# EAGLE board 1.54in-Panel (EAGLE 9.0.1)
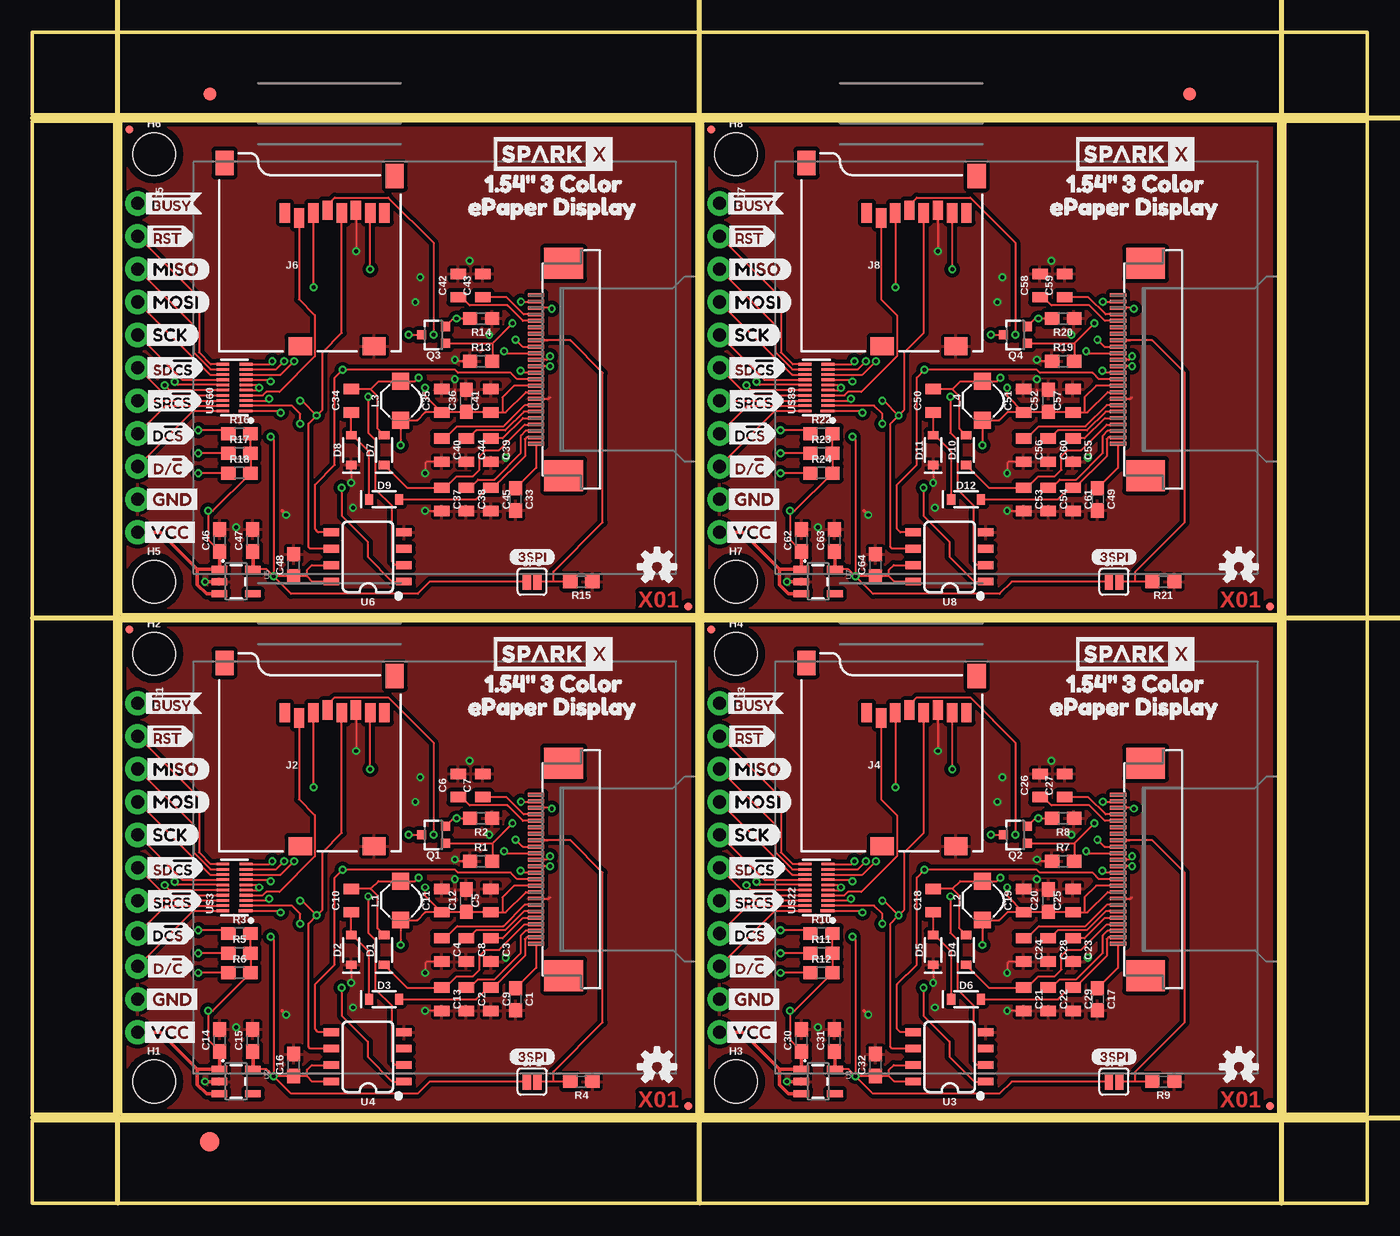
[diagram p0: board, top side]
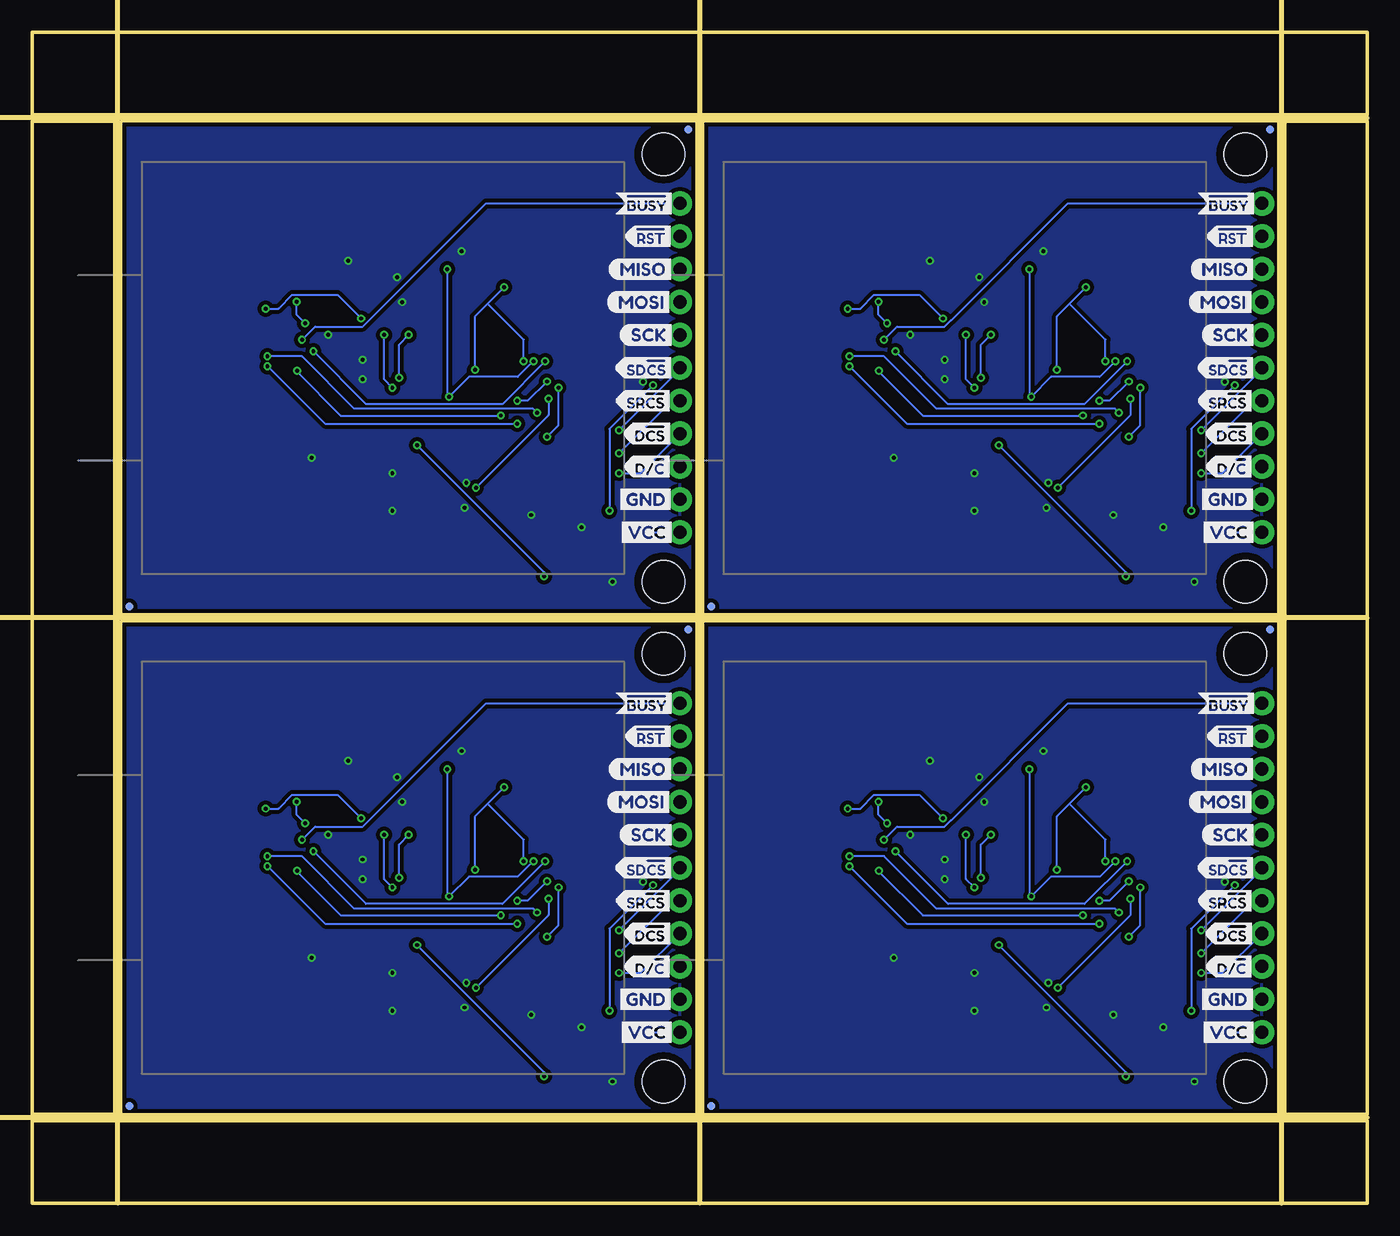
[diagram p1: board, bottom side, seen from below]

Size 103.12 x 90.42 mm. Coordinates in mm from the lower left corner, seen from the top.
Outline: 6.86,6.86 51.31,6.86 51.31,44.96 6.86,44.96 6.86,6.86
Outline: 51.82,6.86 96.27,6.86 96.27,44.96 51.82,44.96 51.82,6.86
Outline: 6.86,45.47 51.31,45.47 51.31,83.57 6.86,83.57 6.86,45.47
Outline: 51.82,45.47 96.27,45.47 96.27,83.57 51.82,83.57 51.82,45.47
Outline: 0,6.35 103.12,6.35 103.12,0 0,0 0,6.35
Outline: 96.77,83.57 103.12,83.57 103.12,6.86 96.77,6.86 96.77,83.57
Outline: 0,90.42 103.12,90.42 103.12,84.07 0,84.07 0,90.42
Outline: 0,83.57 6.35,83.57 6.35,6.86 0,6.86 0,83.57
Copper layers (1*16): Top 0.035mm / dielectric 1.5mm / Bottom 0.035mm
Design rules "SparkFun-2-layer-PCBWay-LIMIT": minimum track width 6mil, minimum drill 0.3mm, track to track 6mil, track to pad 6mil, pad to pad 6mil, via to via 6mil, smd to smd 6mil, copper to edge 6mil, drill to drill 6mil, minimum pad ring 6mil, minimum via ring 6mil, stop-mask expansion 4mil, vias tented up to drill 25mil, thermal gap 10mil
tRestrict: 4 lines
Milling: 6 lines

## Footprints (pad centres in the part's own frame; a part is rotated, then mirrored left to right if it is on the bottom)
0603 = smd 1.1 x 1: 1 -0.85,0; 2 0.85,0
0805 = smd 0.8 x 1.2: 1 -0.9,0; 2 0.9,0
SOD-323 = smd 0.63 x 0.83: A 1.15,0; C -1.15,0
FIDUCIAL-1X2 = smd 1 x 1: 1 0,0
FIDUCIAL-1.5X3 = smd 1.5 x 1.5: 1 0,0
FIDUCIAL-MICRO = smd 0.635 x 0.635: 1 0,0
STAND-OFF = hole 3.302: 0,0
1X11_NO_SILK = drill 1.016 pad 1.88: 1 0,0; 2 2.54,0; 3 5.08,0; 4 7.62,0; 5 10.16,0; 6 12.7,0; 7 15.24,0; 8 17.78,0; 9 20.32,0; 10 22.86,0; 11 25.4,0
MICRO-SD-SOCKET = smd 1.8 x 1.4: CD1 -2.05,0.4; CD2 -7.75,0.4 | smd 0.8 x 1.5: CS -7.84,10.3; DI -6.74,10.7; DO -2.34,10.7; GND -3.44,10.9; RSV1 -8.94,10.7; RSV2 -1.24,10.7; SCLK -4.54,10.7; VCC -5.64,10.9 | smd 1.4 x 1.9: GND1 -13.6,14.55; GND3 -0.45,13.55
SMT-JUMPER_2_NO_SILK = smd 0.635 x 1.27: 1 -0.406,0; 2 0.406,0
INDUCTOR_4.7UH = smd 1.3 x 1.3: P$1 -1.5,0; P$2 1.5,0
SOT323 = smd 0.7 x 0.7: 1 -0.65,-0.925; 2 0.65,-0.925; 3 0,0.925
SOT23-5 = smd 0.55 x 1.2: 1 -0.95,-1.3; 2 0,-1.3; 3 0.95,-1.3; 4 0.95,1.3; 5 -0.95,1.3
SO08 = smd 0.6 x 1.2: 1 -1.905,-2.8; 2 -0.635,-2.8; 3 0.635,-2.8; 4 1.905,-2.8; 5 1.905,2.8; 6 0.635,2.8; 7 -0.635,2.8; 8 -1.905,2.8
24_PIN_FPC_0.5MM = smd 0.3 x 1.25: 1 5.75,2.225; 2 5.25,2.225; 3 4.75,2.225; 4 4.25,2.225; 5 3.75,2.225; 6 3.25,2.225; 7 2.75,2.225; 8 2.25,2.225; 9 1.75,2.225; 10 1.25,2.225; 11 0.75,2.225; 12 0.25,2.225; 13 -0.25,2.225; 14 -0.75,2.225; 15 -1.25,2.225; 16 -1.75,2.225; 17 -2.25,2.225; 18 -2.75,2.225; 19 -3.25,2.225; 20 -3.75,2.225; 21 -4.25,2.225; 22 -4.75,2.225; 23 -5.25,2.225; 24 -5.75,2.225 | smd 2.4 x 3: NC1 8.2,0.1; NC2 -8.2,0.1
UFDFN-20 = smd 0.2 x 1.1: 1 -1.8,-0.85 | smd 0.2 x 1: 2 -1.4,-0.9; 3 -1,-0.9; 4 -0.6,-0.9; 5 -0.2,-0.9; 6 0.2,-0.9; 7 0.6,-0.9; 8 1,-0.9; 9 1.4,-0.9; 10 1.8,-0.9; 11 1.8,0.9; 12 1.4,0.9; 13 1,0.9; 14 0.6,0.9; 15 0.2,0.9; 16 -0.2,0.9; 17 -0.6,0.9; 18 -1,0.9; 19 -1.4,0.9; 20 -1.8,0.9

## Placement (x,y rotation side)
C1  1.0uF  [0603]  37.34,15.75 270 top
C2  1.0uF  [0805]  33.53,15.75 270 top
C3  1.0uF  [0805]  35.43,19.56 270 top
C4  1.0uF  [0805]  31.62,19.56 270 top
C5  1.0uF  [0805]  35.43,23.37 90 top
C6  1.0uF  [0805]  32.89,32.26 90 top
C7  1.0uF  [0805]  34.8,32.26 90 top
C8  1.0uF  [0805]  33.53,19.56 270 top
C9  1.0uF  [0805]  35.43,15.75 270 top
C10  4.7uF  [0805]  24.64,23.37 90 top
C11  4.7uF  [0805]  31.62,23.37 90 top
C12  0.1uF  [0603]  33.53,23.37 90 top
C13  1.0uF  [0805]  31.62,15.75 270 top
C14  1.0uF  [0603]  14.48,12.57 90 top
C15  1.0uF  [0603]  17.02,12.57 90 top
C16  0.1uF  [0603]  20.19,10.67 90 top
C17  1.0uF  [0603]  82.3,15.75 270 top
C18  4.7uF  [0805]  69.6,23.37 90 top
C19  4.7uF  [0805]  76.58,23.37 90 top
C20  0.1uF  [0603]  78.49,23.37 90 top
C21  1.0uF  [0805]  76.58,15.75 270 top
C22  1.0uF  [0805]  78.49,15.75 270 top
C23  1.0uF  [0805]  80.39,19.56 270 top
C24  1.0uF  [0805]  76.58,19.56 270 top
C25  1.0uF  [0805]  80.39,23.37 90 top
C26  1.0uF  [0805]  77.85,32.26 90 top
C27  1.0uF  [0805]  79.76,32.26 90 top
C28  1.0uF  [0805]  78.49,19.56 270 top
C29  1.0uF  [0805]  80.39,15.75 270 top
C30  1.0uF  [0603]  59.44,12.57 90 top
C31  1.0uF  [0603]  61.98,12.57 90 top
C32  0.1uF  [0603]  65.15,10.67 90 top
C33  1.0uF  [0603]  37.34,54.36 270 top
C34  4.7uF  [0805]  24.64,61.98 90 top
C35  4.7uF  [0805]  31.62,61.98 90 top
C36  0.1uF  [0603]  33.53,61.98 90 top
C37  1.0uF  [0805]  31.62,54.36 270 top
C38  1.0uF  [0805]  33.53,54.36 270 top
C39  1.0uF  [0805]  35.43,58.17 270 top
C40  1.0uF  [0805]  31.62,58.17 270 top
C41  1.0uF  [0805]  35.43,61.98 90 top
C42  1.0uF  [0805]  32.89,70.87 90 top
C43  1.0uF  [0805]  34.8,70.87 90 top
C44  1.0uF  [0805]  33.53,58.17 270 top
C45  1.0uF  [0805]  35.43,54.36 270 top
C46  1.0uF  [0603]  14.48,51.18 90 top
C47  1.0uF  [0603]  17.02,51.18 90 top
C48  0.1uF  [0603]  20.19,49.28 90 top
C49  1.0uF  [0603]  82.3,54.36 270 top
C50  4.7uF  [0805]  69.6,61.98 90 top
C51  4.7uF  [0805]  76.58,61.98 90 top
C52  0.1uF  [0603]  78.49,61.98 90 top
C53  1.0uF  [0805]  76.58,54.36 270 top
C54  1.0uF  [0805]  78.49,54.36 270 top
C55  1.0uF  [0805]  80.39,58.17 270 top
C56  1.0uF  [0805]  76.58,58.17 270 top
C57  1.0uF  [0805]  80.39,61.98 90 top
C58  1.0uF  [0805]  77.85,70.87 90 top
C59  1.0uF  [0805]  79.76,70.87 90 top
C60  1.0uF  [0805]  78.49,58.17 270 top
C61  1.0uF  [0805]  80.39,54.36 270 top
C62  1.0uF  [0603]  59.44,51.18 90 top
C63  1.0uF  [0603]  61.98,51.18 90 top
C64  0.1uF  [0603]  65.15,49.28 90 top
D1  0.5A/40V/420mV  [SOD-323]  27.18,19.56 90 top
D2  0.5A/40V/420mV  [SOD-323]  24.64,19.56 90 top
D3  0.5A/40V/420mV  [SOD-323]  27.18,15.75 0 top
D4  0.5A/40V/420mV  [SOD-323]  72.14,19.56 90 top
D5  0.5A/40V/420mV  [SOD-323]  69.6,19.56 90 top
D6  0.5A/40V/420mV  [SOD-323]  72.14,15.75 0 top
D7  0.5A/40V/420mV  [SOD-323]  27.18,58.17 90 top
D8  0.5A/40V/420mV  [SOD-323]  24.64,58.17 90 top
D9  0.5A/40V/420mV  [SOD-323]  27.18,54.36 0 top
D10  0.5A/40V/420mV  [SOD-323]  72.14,58.17 90 top
D11  0.5A/40V/420mV  [SOD-323]  69.6,58.17 90 top
D12  0.5A/40V/420mV  [SOD-323]  72.14,54.36 0 top
E$1  [FIDUCIAL-1X2]  13.72,85.66 0 top
E$2  [FIDUCIAL-1X2]  89.41,85.66 0 top
E$3  [FIDUCIAL-1.5X3]  13.72,4.76 0 top
FD1  FIDUCIALUFIDUCIAL  [FIDUCIAL-MICRO]  7.49,44.32 0 bottom
FD2  FIDUCIALUFIDUCIAL  [FIDUCIAL-MICRO]  50.67,7.49 0 bottom
FD3  FIDUCIALUFIDUCIAL  [FIDUCIAL-MICRO]  50.67,7.49 0 top
FD4  FIDUCIALUFIDUCIAL  [FIDUCIAL-MICRO]  7.49,44.32 0 top
FD5  FIDUCIALUFIDUCIAL  [FIDUCIAL-MICRO]  52.45,44.32 0 bottom
FD6  FIDUCIALUFIDUCIAL  [FIDUCIAL-MICRO]  95.63,7.49 0 bottom
FD7  FIDUCIALUFIDUCIAL  [FIDUCIAL-MICRO]  95.63,7.49 0 top
FD8  FIDUCIALUFIDUCIAL  [FIDUCIAL-MICRO]  52.45,44.32 0 top
FD9  FIDUCIALUFIDUCIAL  [FIDUCIAL-MICRO]  7.49,82.93 0 bottom
FD10  FIDUCIALUFIDUCIAL  [FIDUCIAL-MICRO]  50.67,46.1 0 bottom
FD11  FIDUCIALUFIDUCIAL  [FIDUCIAL-MICRO]  50.67,46.1 0 top
FD12  FIDUCIALUFIDUCIAL  [FIDUCIAL-MICRO]  7.49,82.93 0 top
FD13  FIDUCIALUFIDUCIAL  [FIDUCIAL-MICRO]  52.45,82.93 0 bottom
FD14  FIDUCIALUFIDUCIAL  [FIDUCIAL-MICRO]  95.63,46.1 0 bottom
FD15  FIDUCIALUFIDUCIAL  [FIDUCIAL-MICRO]  95.63,46.1 0 top
FD16  FIDUCIALUFIDUCIAL  [FIDUCIAL-MICRO]  52.45,82.93 0 top
H1  STAND-OFF  [STAND-OFF]  9.4,9.4 0 top
H2  STAND-OFF  [STAND-OFF]  9.4,42.42 0 top
H3  STAND-OFF  [STAND-OFF]  54.36,9.4 0 top
H4  STAND-OFF  [STAND-OFF]  54.36,42.42 0 top
H5  STAND-OFF  [STAND-OFF]  9.4,48.01 0 top
H6  STAND-OFF  [STAND-OFF]  9.4,81.03 0 top
H7  STAND-OFF  [STAND-OFF]  54.36,48.01 0 top
H8  STAND-OFF  [STAND-OFF]  54.36,81.03 0 top
J1  [1X11_NO_SILK]  8.13,38.61 270 top
J2  MICRO-SD_CARD_SOCKETPUSH-PUSH  [MICRO-SD-SOCKET]  28.45,27.18 0 top
J3  [1X11_NO_SILK]  53.09,38.61 270 top
J4  MICRO-SD_CARD_SOCKETPUSH-PUSH  [MICRO-SD-SOCKET]  73.41,27.18 0 top
J5  [1X11_NO_SILK]  8.13,77.22 270 top
J6  MICRO-SD_CARD_SOCKETPUSH-PUSH  [MICRO-SD-SOCKET]  28.45,65.79 0 top
J7  [1X11_NO_SILK]  53.09,77.22 270 top
J8  MICRO-SD_CARD_SOCKETPUSH-PUSH  [MICRO-SD-SOCKET]  73.41,65.79 0 top
JP1  3SPI  [SMT-JUMPER_2_NO_SILK]  38.61,9.4 0 top
JP2  3SPI  [SMT-JUMPER_2_NO_SILK]  83.57,9.4 0 top
JP3  3SPI  [SMT-JUMPER_2_NO_SILK]  38.61,48.01 0 top
JP4  3SPI  [SMT-JUMPER_2_NO_SILK]  83.57,48.01 0 top
L1  10uH  [INDUCTOR_4.7UH]  28.45,23.37 90 top
L2  10uH  [INDUCTOR_4.7UH]  73.41,23.37 90 top
L3  10uH  [INDUCTOR_4.7UH]  28.45,61.98 90 top
L4  10uH  [INDUCTOR_4.7UH]  73.41,61.98 90 top
LOGO1  OSHW-LOGOS  [OSHW-LOGO-S]  48.26,10.54 0 top
LOGO2  OSHW-LOGOS  [OSHW-LOGO-S]  93.22,10.54 0 top
LOGO3  OSHW-LOGOS  [OSHW-LOGO-S]  48.26,49.15 0 top
LOGO4  OSHW-LOGOS  [OSHW-LOGO-S]  93.22,49.15 0 top
Q1  310mA/60V/1.6Ω  [SOT323]  30.99,28.45 90 top
Q2  310mA/60V/1.6Ω  [SOT323]  75.95,28.45 90 top
Q3  310mA/60V/1.6Ω  [SOT323]  30.99,67.06 90 top
Q4  310mA/60V/1.6Ω  [SOT323]  75.95,67.06 90 top
R1  10k  [0603]  34.67,26.42 0 top
R2  0.47ohm  [0603]  34.67,29.72 180 top
R3  10k  [0603]  16,20.83 0 top
R4  10k  [0603]  42.42,9.4 180 top
R5  10k  [0603]  16,19.3 0 top
R6  10k  [0603]  16,17.78 0 top
R7  10k  [0603]  79.63,26.42 0 top
R8  0.47ohm  [0603]  79.63,29.72 180 top
R9  10k  [0603]  87.38,9.4 180 top
R10  10k  [0603]  60.96,20.83 0 top
R11  10k  [0603]  60.96,19.3 0 top
R12  10k  [0603]  60.96,17.78 0 top
R13  10k  [0603]  34.67,65.02 0 top
R14  0.47ohm  [0603]  34.67,68.33 180 top
R15  10k  [0603]  42.42,48.01 180 top
R16  10k  [0603]  16,59.44 0 top
R17  10k  [0603]  16,57.91 0 top
R18  10k  [0603]  16,56.39 0 top
R19  10k  [0603]  79.63,65.02 0 top
R20  0.47ohm  [0603]  79.63,68.33 180 top
R21  10k  [0603]  87.38,48.01 180 top
R22  10k  [0603]  60.96,59.44 0 top
R23  10k  [0603]  60.96,57.91 0 top
R24  10k  [0603]  60.96,56.39 0 top
U1  3.3V  [SOT23-5]  60.71,9.4 270 top
U2  3.3V  [SOT23-5]  15.75,9.4 270 top
U3  23K640  [SO08]  70.87,11.3 90 top
U4  23K640  [SO08]  25.91,11.3 90 top
U5  3.3V  [SOT23-5]  15.75,48.01 270 top
U6  23K640  [SO08]  25.91,49.91 90 top
U7  3.3V  [SOT23-5]  60.71,48.01 270 top
U8  23K640  [SO08]  70.87,49.91 90 top
U$1  24_PIN_FPC_0.5MM  [24_PIN_FPC_0.5MM]  41.15,25.78 90 top
U$2  [VCC1]  8.25,13.21 0 top
U$3  TXB0108DQSR  [UFDFN-20]  15.62,24.38 90 top
U$4  [#BUSY0]  8.13,38.61 0 top
U$5  SPARKX-LOGO4  [SPARKX-MEDIUM]  40.26,42.42 0 top
U$6  [#BUSY1]  13.34,38.61 0 bottom
U$7  [D##C10]  8.25,18.29 0 top
U$8  [MISO1]  8.38,33.53 0 top
U$9  [D#CS2]  8.25,20.83 0 top
U$10  [SD#CS0]  8.25,25.91 0 top
U$11  [#RST1]  8.25,36.07 0 top
U$12  [3SPI0]  36.83,11.3 0 top
U$13  [VCC1]  13.08,13.21 0 bottom
U$14  [GND9]  8.38,15.75 0 top
U$15  [SR#CS1]  8.25,23.37 0 top
U$16  [MOSI0]  8.38,30.99 0 top
U$17  [SCK2]  8.38,28.45 0 top
U$18  24_PIN_FPC_0.5MM  [24_PIN_FPC_0.5MM]  86.11,25.78 90 top
U$19  [3_COLOR2]  38.1,40.13 0 top
U$20  [#RST2]  12.57,36.07 0 bottom
U$21  [EPAPER_DISPLAY5]  32.51,38.35 0 top
U$22  TXB0108DQSR  [UFDFN-20]  60.58,24.38 90 top
U$23  [1#54#1]  33.78,40.13 0 top
U$24  [MISO3]  13.72,33.53 0 bottom
U$25  [MOSI4]  13.84,30.99 0 bottom
U$26  [SCK5]  12.83,28.45 0 bottom
U$27  [SD#CS6]  13.34,25.91 0 bottom
U$28  [SR#CS7]  13.34,23.37 0 bottom
U$29  [D#CS8]  12.7,20.83 0 bottom
U$30  [D##C9]  12.7,18.29 0 bottom
U$31  [GND11]  13.21,15.75 0 bottom
U$32  [D##C10]  53.21,18.29 0 top
U$33  [#RST1]  53.21,36.07 0 top
U$34  [GND9]  53.34,15.75 0 top
U$35  [D#CS2]  53.21,20.83 0 top
U$36  [SD#CS0]  53.21,25.91 0 top
U$37  [SR#CS1]  53.21,23.37 0 top
U$38  [MISO1]  53.34,33.53 0 top
U$39  [MOSI0]  53.34,30.99 0 top
U$40  [SCK2]  53.34,28.45 0 top
U$41  [#BUSY0]  53.09,38.61 0 top
U$42  SPARKX-LOGO4  [SPARKX-MEDIUM]  85.22,42.42 0 top
U$43  [3_COLOR2]  83.06,40.13 0 top
U$44  [1#54#1]  78.74,40.13 0 top
U$45  [#BUSY1]  58.29,38.61 0 bottom
U$46  [#RST2]  57.53,36.07 0 bottom
U$47  [MISO3]  58.67,33.53 0 bottom
U$48  [MOSI4]  58.8,30.99 0 bottom
U$49  [SCK5]  57.78,28.45 0 bottom
U$50  [SD#CS6]  58.29,25.91 0 bottom
U$51  [SR#CS7]  58.29,23.37 0 bottom
U$52  [D#CS8]  57.66,20.83 0 bottom
U$53  [D##C9]  57.66,18.29 0 bottom
U$54  [GND11]  58.17,15.75 0 bottom
U$55  [3SPI0]  81.79,11.3 0 top
U$56  [VCC1]  53.21,13.21 0 top
U$57  [VCC1]  58.04,13.21 0 bottom
U$58  [EPAPER_DISPLAY5]  77.47,38.35 0 top
U$59  24_PIN_FPC_0.5MM  [24_PIN_FPC_0.5MM]  41.15,64.39 90 top
U$60  TXB0108DQSR  [UFDFN-20]  15.62,62.99 90 top
U$61  [D##C10]  8.25,56.9 0 top
U$62  [#RST1]  8.25,74.68 0 top
U$63  [GND9]  8.38,54.36 0 top
U$64  [D#CS2]  8.25,59.44 0 top
U$65  [SD#CS0]  8.25,64.52 0 top
U$66  [SR#CS1]  8.25,61.98 0 top
U$67  [MISO1]  8.38,72.14 0 top
U$68  [MOSI0]  8.38,69.6 0 top
U$69  [SCK2]  8.38,67.06 0 top
U$70  [#BUSY0]  8.13,77.22 0 top
U$71  SPARKX-LOGO4  [SPARKX-MEDIUM]  40.26,81.03 0 top
U$72  [3_COLOR2]  38.1,78.74 0 top
U$73  [1#54#1]  33.78,78.74 0 top
U$74  [#BUSY1]  13.34,77.22 0 bottom
U$75  [#RST2]  12.57,74.68 0 bottom
U$76  [MISO3]  13.72,72.14 0 bottom
U$77  [MOSI4]  13.84,69.6 0 bottom
U$78  [SCK5]  12.83,67.06 0 bottom
U$79  [SD#CS6]  13.34,64.52 0 bottom
U$80  [SR#CS7]  13.34,61.98 0 bottom
U$81  [D#CS8]  12.7,59.44 0 bottom
U$82  [D##C9]  12.7,56.9 0 bottom
U$83  [GND11]  13.21,54.36 0 bottom
U$84  [3SPI0]  36.83,49.91 0 top
U$85  [VCC1]  8.25,51.82 0 top
U$86  [VCC1]  13.08,51.82 0 bottom
U$87  [EPAPER_DISPLAY5]  32.51,76.96 0 top
U$88  24_PIN_FPC_0.5MM  [24_PIN_FPC_0.5MM]  86.11,64.39 90 top
U$89  TXB0108DQSR  [UFDFN-20]  60.58,62.99 90 top
U$90  [D##C10]  53.21,56.9 0 top
U$91  [#RST1]  53.21,74.68 0 top
U$92  [GND9]  53.34,54.36 0 top
U$93  [D#CS2]  53.21,59.44 0 top
U$94  [SD#CS0]  53.21,64.52 0 top
U$95  [SR#CS1]  53.21,61.98 0 top
U$96  [MISO1]  53.34,72.14 0 top
U$97  [MOSI0]  53.34,69.6 0 top
U$98  [SCK2]  53.34,67.06 0 top
U$99  [#BUSY0]  53.09,77.22 0 top
U$100  SPARKX-LOGO4  [SPARKX-MEDIUM]  85.22,81.03 0 top
U$101  [3_COLOR2]  83.06,78.74 0 top
U$102  [1#54#1]  78.74,78.74 0 top
U$103  [#BUSY1]  58.29,77.22 0 bottom
U$104  [#RST2]  57.53,74.68 0 bottom
U$105  [MISO3]  58.67,72.14 0 bottom
U$106  [MOSI4]  58.8,69.6 0 bottom
U$107  [SCK5]  57.78,67.06 0 bottom
U$108  [SD#CS6]  58.29,64.52 0 bottom
U$109  [SR#CS7]  58.29,61.98 0 bottom
U$110  [D#CS8]  57.66,59.44 0 bottom
U$111  [D##C9]  57.66,56.9 0 bottom
U$112  [GND11]  58.17,54.36 0 bottom
U$113  [3SPI0]  81.79,49.91 0 top
U$114  [VCC1]  53.21,51.82 0 top
U$115  [VCC1]  58.04,51.82 0 bottom
U$116  [EPAPER_DISPLAY5]  77.47,76.96 0 top

## Library data of the parts
C1 C14 C15 C17 C30 C31 C33 C46 C47 C49 C62 C63 = SparkFun-Capacitors; PROD_ID: CAP-00868
C2-C9 C13 C21-C29 C37-C45 C53-C61 = SparkFun-Capacitors; PROD_ID: CAP-08064
C10 C11 C18 C19 C34 C35 C50 C51 = SparkFun-Capacitors; PROD_ID: CAP-08402
C12 C16 C20 C32 C36 C48 C52 C64 = SparkFun-Capacitors; PROD_ID: CAP-00810
D1-D12 = SparkFun-DiscreteSemi; PROD_ID: DIO-10955
E$1 E$2 FD1-FD16 LOGO1-LOGO4 = SparkFun-Aesthetics
E$3 = SparkFun-Retired
H1-H8 = SparkFun-Hardware
J1 J3 J5 J7 = SparkFun-Connectors
J2 J4 J6 J8 = SparkFun-Connectors; PROD_ID: CONN-07820
JP1-JP4 = SparkFun-Jumpers
L1-L4 = SparkFun-Coils; PROD_ID: NDUC-13968
Q1-Q4 = SparkFun-DiscreteSemi; PROD_ID: TRANS-11151
R1 R3-R7 R9-R13 R15-R19 R21-R24 = SparkFun-Resistors; PROD_ID: RES-00824
R2 R8 R14 R20 = SparkFun-Resistors
U1 U2 U5 U7 = SparkFun-IC-Power; PROD_ID: VREG-12457
U3 U4 U6 U8 = SparkFun-IC-Memory
U$1 U$18 U$59 U$88 = ePaper
U$2 U$13 U$56 U$57 U$85 U$86 U$114 U$115 = buzzard_power
U$3 U$22 U$60 U$89 = SparkFun-IC-Comms; PROD_ID: IC-12292
U$4 U$41 U$70 U$99 = buzzard_labels (27)
U$5 U$42 U$71 U$100 = SparkX
U$6 U$20 U$24-U$29 U$45-U$52 U$74-U$81 U$103-U$110 = buzzard_labels (32)
U$7 U$11 U$14 U$32-U$34 U$61-U$63 U$90-U$92 = buzzard_labels (22)
U$8 U$16 U$17 U$38-U$40 U$67-U$69 U$96-U$98 = buzzard_labels (25)
U$9 U$10 U$35 U$36 U$64 U$65 U$93 U$94 = buzzard_labels (23)
U$12 U$30 U$31 U$53-U$55 U$82-U$84 U$111-U$113 = buzzard_labels (33)
U$15 U$37 U$66 U$95 = buzzard_labels (24)
U$19 U$23 U$43 U$44 U$72 U$73 U$101 U$102 = buzzard_labels (30)
U$21 U$58 U$87 U$116 = buzzard_labels (35)

## Nets
3.3V: C5.1 C11.1 C12.1 C15.1 C16.1 J2.VCC JP1.1 L1.P$1 U2.5 U4.7 U4.8 U$1.15 U$1.16 U$3.5 U$3.6
3.3V1: C19.1 C20.1 C25.1 C31.1 C32.1 J4.VCC JP2.1 L2.P$1 U1.5 U3.7 U3.8 U$18.15 U$18.16 U$22.5 U$22.6
3.3V2: C35.1 C36.1 C41.1 C47.1 C48.1 J6.VCC JP3.1 L3.P$1 U5.5 U6.7 U6.8 U$59.15 U$59.16 U$60.5 U$60.6
3.3V3: C51.1 C52.1 C57.1 C63.1 C64.1 J8.VCC JP4.1 L4.P$1 U7.5 U8.7 U8.8 U$88.15 U$88.16 U$89.5 U$89.6
5V: C14.1 J1.11 R3.2 R5.2 R6.2 U2.1 U2.3 U$3.16
5V1: C30.1 J3.11 R10.2 R11.2 R12.2 U1.1 U1.3 U$22.16
5V2: C46.1 J5.11 R16.2 R17.2 R18.2 U5.1 U5.3 U$60.16
5V3: C62.1 J7.11 R22.2 R23.2 R24.2 U7.1 U7.3 U$89.16
5V_!CS!(D): J1.8 R6.1 U$3.19
5V_!CS!(D)1: J3.8 R12.1 U$22.19
5V_!CS!(D)2: J5.8 R18.1 U$60.19
5V_!CS!(D)3: J7.8 R24.1 U$89.19
5V_!CS!(SD): J1.6 R3.1 U$3.17
5V_!CS!(SD)1: J3.6 R10.1 U$22.17
5V_!CS!(SD)2: J5.6 R16.1 U$60.17
5V_!CS!(SD)3: J7.6 R22.1 U$89.17
5V_!CS!(SR): J1.7 R5.1 U$3.18
5V_!CS!(SR)1: J3.7 R11.1 U$22.18
5V_!CS!(SR)2: J5.7 R17.1 U$60.18
5V_!CS!(SR)3: J7.7 R23.1 U$89.18
5V_!RES: J1.2 U$3.11
5V_!RES1: J3.2 U$22.11
5V_!RES2: J5.2 U$60.11
5V_!RES3: J7.2 U$89.11
5V_D/!C: J1.9 U$3.20
5V_D/!C1: J3.9 U$22.20
5V_D/!C2: J5.9 U$60.20
5V_D/!C3: J7.9 U$89.20
5V_MISO: J1.3 U$3.12
5V_MISO1: J3.3 U$22.12
5V_MISO2: J5.3 U$60.12
5V_MISO3: J7.3 U$89.12
5V_MOSI: J1.4 U$3.13
5V_MOSI1: J3.4 U$22.13
5V_MOSI2: J5.4 U$60.13
5V_MOSI3: J7.4 U$89.13
5V_SCLK: J1.5 U$3.14
5V_SCLK1: J3.5 U$22.14
5V_SCLK2: J5.5 U$60.14
5V_SCLK3: J7.5 U$89.14
!BUSY: J1.1 U$1.9
!BUSY1: J3.1 U$18.9
!BUSY2: J5.1 U$59.9
!BUSY3: J7.1 U$88.9
!CS!(D): U$1.12 U$3.2
!CS!(D)1: U$18.12 U$22.2
!CS!(D)2: U$59.12 U$60.2
!CS!(D)3: U$88.12 U$89.2
!CS!(SD): J2.CS U$3.4
!CS!(SD)1: J4.CS U$22.4
!CS!(SD)2: J6.CS U$60.4
!CS!(SD)3: J8.CS U$89.4
!CS!(SR): U4.1 U$3.3
!CS!(SR)1: U3.1 U$22.3
!CS!(SR)2: U6.1 U$60.3
!CS!(SR)3: U8.1 U$89.3
!RES: U$1.10 U$3.10
!RES1: U$18.10 U$22.10
!RES2: U$59.10 U$60.10
!RES3: U$88.10 U$89.10
BS: JP1.2 R4.2 U$1.8
BS1: JP2.2 R9.2 U$18.8
BS2: JP3.2 R15.2 U$59.8
BS3: JP4.2 R21.2 U$88.8
D/!C: U$1.11 U$3.1
D/!C1: U$18.11 U$22.1
D/!C2: U$59.11 U$60.1
D/!C3: U$88.11 U$89.1
GDR: Q1.1 R1.2 U$1.2
GDR1: Q2.1 R7.2 U$18.2
GDR2: Q3.1 R13.2 U$59.2
GDR3: Q4.1 R19.2 U$88.2
GND: C1.2 C2.2 C3.2 C4.2 C5.2 C6.2 C7.2 C8.2 C9.2 C11.2 C12.2 C13.2 C14.2 C15.2 C16.2 D2.C J1.10 J2.CD1 J2.GND R1.1 R2.1 R4.1 U2.2 U4.4 U$1.17 U$3.15
GND1: C17.2 C19.2 C20.2 C21.2 C22.2 C23.2 C24.2 C25.2 C26.2 C27.2 C28.2 C29.2 C30.2 C31.2 C32.2 D5.C J3.10 J4.CD1 J4.GND R7.1 R8.1 R9.1 U1.2 U3.4 U$18.17 U$22.15
GND2: C33.2 C35.2 C36.2 C37.2 C38.2 C39.2 C40.2 C41.2 C42.2 C43.2 C44.2 C45.2 C46.2 C47.2 C48.2 D8.C J5.10 J6.CD1 J6.GND R13.1 R14.1 R15.1 U5.2 U6.4 U$59.17 U$60.15
GND3: C49.2 C51.2 C52.2 C53.2 C54.2 C55.2 C56.2 C57.2 C58.2 C59.2 C60.2 C61.2 C62.2 C63.2 C64.2 D11.C J7.10 J8.CD1 J8.GND R19.1 R20.1 R21.1 U7.2 U8.4 U$88.17 U$89.15
MISO: J2.DO U4.2 U$3.9
MISO1: J4.DO U3.2 U$22.9
MISO2: J6.DO U6.2 U$60.9
MISO3: J8.DO U8.2 U$89.9
MOSI: J2.DI U4.5 U$1.14 U$3.8
MOSI1: J4.DI U3.5 U$18.14 U$22.8
MOSI2: J6.DI U6.5 U$59.14 U$60.8
MOSI3: J8.DI U8.5 U$88.14 U$89.8
N$1: C18.1 D5.A D6.C
N$2: C10.1 D2.A D3.C
N$3: C18.2 D4.A L2.P$2 Q2.3
N$4: J4.RSV1
N$5: C10.2 D1.A L1.P$2 Q1.3
N$6: C34.1 D8.A D9.C
N$7: C34.2 D7.A L3.P$2 Q3.3
N$8: J6.RSV1
N$9: C50.1 D11.A D12.C
N$10: C50.2 D10.A L4.P$2 Q4.3
N$11: J2.RSV1
N$12: J8.RSV1
PREVGH: C13.1 D1.C U$1.21
PREVGH1: C21.1 D4.C U$18.21
PREVGH2: C37.1 D7.C U$59.21
PREVGH3: C53.1 D10.C U$88.21
PREVGL: C9.1 D3.A U$1.23
PREVGL1: C29.1 D6.A U$18.23
PREVGL2: C45.1 D9.A U$59.23
PREVGL3: C61.1 D12.A U$88.23
RESE: Q1.2 R2.2 U$1.3
RESE1: Q2.2 R8.2 U$18.3
RESE2: Q3.2 R14.2 U$59.3
RESE3: Q4.2 R20.2 U$88.3
SCLK: J2.SCLK U4.6 U$1.13 U$3.7
SCLK1: J4.SCLK U3.6 U$18.13 U$22.7
SCLK2: J6.SCLK U6.6 U$59.13 U$60.7
SCLK3: J8.SCLK U8.6 U$88.13 U$89.7
TSCL: U$1.6
TSCL1: U$18.6
TSCL2: U$59.6
TSCL3: U$88.6
TSDA: U$1.7
TSDA1: U$18.7
TSDA2: U$59.7
TSDA3: U$88.7
VCOM: C1.1 U$1.24
VCOM1: C17.1 U$18.24
VCOM2: C33.1 U$59.24
VCOM3: C49.1 U$88.24
VDD: C4.1 U$1.18
VDD1: C24.1 U$18.18
VDD2: C40.1 U$59.18
VDD3: C56.1 U$88.18
VGH: C6.1 U$1.5
VGH1: C26.1 U$18.5
VGH2: C42.1 U$59.5
VGH3: C58.1 U$88.5
VGL: C7.1 U$1.4
VGL1: C27.1 U$18.4
VGL2: C43.1 U$59.4
VGL3: C59.1 U$88.4
VPP: C8.1 U$1.19
VPP1: C28.1 U$18.19
VPP2: C44.1 U$59.19
VPP3: C60.1 U$88.19
VSH: C3.1 U$1.20
VSH1: C23.1 U$18.20
VSH2: C39.1 U$59.20
VSH3: C55.1 U$88.20
VSL: C2.1 U$1.22
VSL1: C22.1 U$18.22
VSL2: C38.1 U$59.22
VSL3: C54.1 U$88.22

## Tracks (layer width: path | path; a pad name or v marks a point on that pad's centre or on a via)
3.3V  (via drill 0.3)
  Top 0.152: C5.1 C11.1 | 35.65,22.47 C5.1 | C11.1 30.35,22.47 29.75,21.87 L1.P$1 | 28.47,21.84 L1.P$1 | U4.7 21.59,10.67 21.23,10.31 21.23,9.8 | U2.5 18.1,10.35 v18.63,9.82 | J2.VCC 22.81,38.5 23.37,39.06 27.5,39.06 30.99,35.57 v30.99,28.45 | L1.P$1 v28.45,19.94 | C12.1 35.38,22.52 C5.1 | C11.1 30.35,23.74 v30.35,24.38 | U$1.16 38.13,24.03 36.56,22.47 36.32,22.47 | C5.1 36.32,22.47 | 38.37,24.53 U$1.15 37.23,24.53 36.32,23.62 36.32,22.47 | U4.8 21.63,9.4 21.23,9.8 | 21.23,9.8 21.21,9.82 C16.1 v18.63,9.82 | JP1.1 30.71,9.4 29.77,8.46 19.99,8.46 18.67,9.78 | 18.67,9.78 v18.63,9.82 | U$3.6 17.45,24.58 17.53,24.51 v17.53,24.38 17.53,24.26 17.45,24.18 U$3.5 | v18.41,20.57 18.67,20.32 18.67,9.78
  Top 0.254: C15.1 17.05,11.69 U2.5
  Bottom 0.152: v30.35,24.38 30.99,25.02 v30.99,28.45 | v18.41,20.57 17.53,21.46 v17.53,24.38 | v18.63,9.82 18.63,10.12 v28.45,19.94
3.3V1  (via drill 0.3)
  Top 0.152: C25.1 C19.1 | 80.61,22.47 C25.1 | C19.1 75.31,22.47 74.71,21.87 L2.P$1 | 73.43,21.84 L2.P$1 | U3.7 66.55,10.67 66.19,10.31 66.19,9.8 | U1.5 63.06,10.35 v63.59,9.82 | J4.VCC 67.77,38.5 68.33,39.06 72.46,39.06 75.95,35.57 v75.95,28.45 | L2.P$1 v73.41,19.94 | C20.1 80.34,22.52 C25.1 | C19.1 75.31,23.74 v75.31,24.38 | U$18.16 83.09,24.03 81.52,22.47 81.28,22.47 | C25.1 81.28,22.47 | 83.33,24.53 U$18.15 82.19,24.53 81.28,23.62 81.28,22.47 | U3.8 66.59,9.4 66.19,9.8 | 66.19,9.8 66.17,9.82 C32.1 v63.59,9.82 | JP2.1 75.66,9.4 74.72,8.46 64.95,8.46 63.63,9.78 | 63.63,9.78 v63.59,9.82 | U$22.6 62.41,24.58 62.48,24.51 v62.48,24.38 62.48,24.26 62.41,24.18 U$22.5 | v63.37,20.57 63.63,20.32 63.63,9.78
  Top 0.254: C31.1 62.01,11.69 U1.5
  Bottom 0.152: v75.31,24.38 75.95,25.02 v75.95,28.45 | v63.37,20.57 62.48,21.46 v62.48,24.38 | v63.59,9.82 63.59,10.12 v73.41,19.94
3.3V2  (via drill 0.3)
  Top 0.152: C41.1 C35.1 | 35.65,61.08 C41.1 | C35.1 30.35,61.08 29.75,60.48 L3.P$1 | 28.47,60.45 L3.P$1 | U6.7 21.59,49.28 21.23,48.91 21.23,48.41 | U5.5 18.1,48.96 v18.63,48.43 | J6.VCC 22.81,77.11 23.37,77.67 27.5,77.67 30.99,74.18 v30.99,67.06 | L3.P$1 v28.45,58.55 | C36.1 35.38,61.13 C41.1 | C35.1 30.35,62.35 v30.35,62.99 | U$59.16 38.13,62.64 36.56,61.08 36.32,61.08 | C41.1 36.32,61.08 | 38.37,63.14 U$59.15 37.23,63.14 36.32,62.23 36.32,61.08 | U6.8 21.63,48.01 21.23,48.41 | 21.23,48.41 21.21,48.43 C48.1 v18.63,48.43 | JP3.1 30.71,48.01 29.77,47.07 19.99,47.07 18.67,48.39 | 18.67,48.39 v18.63,48.43 | U$60.6 17.45,63.19 17.53,63.12 v17.53,62.99 17.53,62.86 17.45,62.79 U$60.5 | v18.41,59.18 18.67,58.93 18.67,48.39
  Top 0.254: C47.1 17.05,50.3 U5.5
  Bottom 0.152: v30.35,62.99 30.99,63.63 v30.99,67.06 | v18.41,59.18 17.53,60.07 v17.53,62.99 | v18.63,48.43 18.63,48.73 v28.45,58.55
3.3V3  (via drill 0.3)
  Top 0.152: C57.1 C51.1 | 80.61,61.08 C57.1 | C51.1 75.31,61.08 74.71,60.48 L4.P$1 | 73.43,60.45 L4.P$1 | U8.7 66.55,49.28 66.19,48.91 66.19,48.41 | U7.5 63.06,48.96 v63.59,48.43 | J8.VCC 67.77,77.11 68.33,77.67 72.46,77.67 75.95,74.18 v75.95,67.06 | L4.P$1 v73.41,58.55 | C52.1 80.34,61.13 C57.1 | C51.1 75.31,62.35 v75.31,62.99 | U$88.16 83.09,62.64 81.52,61.08 81.28,61.08 | C57.1 81.28,61.08 | 83.33,63.14 U$88.15 82.19,63.14 81.28,62.23 81.28,61.08 | U8.8 66.59,48.01 66.19,48.41 | 66.19,48.41 66.17,48.43 C64.1 v63.59,48.43 | JP4.1 75.66,48.01 74.72,47.07 64.95,47.07 63.63,48.39 | 63.63,48.39 v63.59,48.43 | U$89.6 62.41,63.19 62.48,63.12 v62.48,62.99 62.48,62.86 62.41,62.79 U$89.5 | v63.37,59.18 63.63,58.93 63.63,48.39
  Top 0.254: C63.1 62.01,50.3 U7.5
  Bottom 0.152: v75.31,62.99 75.95,63.63 v75.95,67.06 | v63.37,59.18 62.48,60.07 v62.48,62.99 | v63.59,48.43 63.59,48.73 v73.41,58.55
5V  (via drill 0.3)
  Top 0.152: U$3.16 10.61,24.18 v10.22,24.57 | C14.1 13.59,12.61 v13.59,14.86 13.93,14.86 R6.2 R5.2 R3.2
  Top 0.254: 12.75,10.35 U2.1 14.48,10.38 C14.1 | U2.3 13.46,8.45 12.75,9.16 12.75,10.35 | J1.11 9.89,13.21 12.75,10.35
  Bottom 0.152: 10.16,13.21 J1.11 | v10.22,24.57 13.59,21.2 v13.59,14.86
5V1  (via drill 0.3)
  Top 0.152: U$22.16 55.56,24.18 v55.18,24.57 | C30.1 58.55,12.61 v58.55,14.86 58.89,14.86 R12.2 R11.2 R10.2
  Top 0.254: 57.71,10.35 U1.1 59.44,10.38 C30.1 | U1.3 58.42,8.45 57.71,9.16 57.71,10.35 | J3.11 54.85,13.21 57.71,10.35
  Bottom 0.152: 55.12,13.21 J3.11 | v55.18,24.57 58.55,21.2 v58.55,14.86
5V2  (via drill 0.3)
  Top 0.152: U$60.16 10.61,62.79 v10.22,63.18 | C46.1 13.59,51.22 v13.59,53.47 13.93,53.47 R18.2 R17.2 R16.2
  Top 0.254: 12.75,48.96 U5.1 14.48,48.99 C46.1 | U5.3 13.46,47.06 12.75,47.76 12.75,48.96 | J5.11 9.89,51.82 12.75,48.96
  Bottom 0.152: 10.16,51.82 J5.11 | v10.22,63.18 13.59,59.81 v13.59,53.47
5V3  (via drill 0.3)
  Top 0.152: U$89.16 55.56,62.79 v55.18,63.18 | C62.1 58.55,51.22 v58.55,53.47 58.89,53.47 R24.2 R23.2 R22.2
  Top 0.254: 57.71,48.96 U7.1 59.44,48.99 C62.1 | U7.3 58.42,47.06 57.71,47.76 57.71,48.96 | J7.11 54.85,51.82 57.71,48.96
  Bottom 0.152: 55.12,51.82 J7.11 | v55.18,63.18 58.55,59.81 v58.55,53.47
5V_!CS!(D)  (via drill 0.3)
  Top 0.152: J1.8 10.28,22.98 U$3.19 | R6.1 v12.83,17.78
  Bottom 0.152: v12.83,17.78 11.18,17.78 J1.8
5V_!CS!(D)1  (via drill 0.3)
  Top 0.152: J3.8 55.24,22.98 U$22.19 | R12.1 v57.78,17.78
  Bottom 0.152: v57.78,17.78 56.13,17.78 J3.8
5V_!CS!(D)2  (via drill 0.3)
  Top 0.152: J5.8 10.28,61.59 U$60.19 | R18.1 v12.83,56.39
  Bottom 0.152: v12.83,56.39 11.18,56.39 J5.8
5V_!CS!(D)3  (via drill 0.3)
  Top 0.152: J7.8 55.24,61.59 U$89.19 | R24.1 v57.78,56.39
  Bottom 0.152: v57.78,56.39 56.13,56.39 J7.8
5V_!CS!(SD)  (via drill 0.3)
  Top 0.152: J1.6 10.25,23.78 U$3.17 | R3.1 14.9,21.08 v12.83,21.08
  Bottom 0.152: v12.83,21.08 8.13,25.78 J1.6
5V_!CS!(SD)1  (via drill 0.3)
  Top 0.152: J3.6 55.21,23.78 U$22.17 | R10.1 59.86,21.08 v57.78,21.08
  Bottom 0.152: v57.78,21.08 53.09,25.78 J3.6
5V_!CS!(SD)2  (via drill 0.3)
  Top 0.152: J5.6 10.25,62.39 U$60.17 | R16.1 14.9,59.69 v12.83,59.69
  Bottom 0.152: v12.83,59.69 8.13,64.39 J5.6
5V_!CS!(SD)3  (via drill 0.3)
  Top 0.152: J7.6 55.21,62.39 U$89.17 | R22.1 59.86,59.69 v57.78,59.69
  Bottom 0.152: v57.78,59.69 53.09,64.39 J7.6
5V_!CS!(SR)  (via drill 0.3)
  Top 0.152: J1.7 8.14,23.38 U$3.18 | R5.1 v12.83,19.3
  Bottom 0.152: v12.83,19.3 8.76,23.37 J1.7
5V_!CS!(SR)1  (via drill 0.3)
  Top 0.152: J3.7 53.1,23.38 U$22.18 | R11.1 v57.78,19.3
  Bottom 0.152: v57.78,19.3 53.72,23.37 J3.7
5V_!CS!(SR)2  (via drill 0.3)
  Top 0.152: J5.7 8.14,61.99 U$60.18 | R17.1 v12.83,57.91
  Bottom 0.152: v12.83,57.91 8.76,61.98 J5.7
5V_!CS!(SR)3  (via drill 0.3)
  Top 0.152: J7.7 53.1,61.99 U$89.18 | R23.1 v57.78,57.91
  Bottom 0.152: v57.78,57.91 53.72,61.98 J7.7
5V_!RES
  Top 0.152: U$3.11 13.79,26.18 12.88,27.1 12.88,31.32 J1.2
5V_!RES1
  Top 0.152: U$22.11 58.75,26.18 57.83,27.1 57.83,31.32 J3.2
5V_!RES2
  Top 0.152: U$60.11 13.79,64.79 12.88,65.71 12.88,69.93 J5.2
5V_!RES3
  Top 0.152: U$89.11 58.75,64.79 57.83,65.71 57.83,69.93 J7.2
5V_D/!C
  Top 0.152: J1.9 12.42,22.58 U$3.20
5V_D/!C1
  Top 0.152: J3.9 57.38,22.58 U$22.20
5V_D/!C2
  Top 0.152: J5.9 12.42,61.19 U$60.20
5V_D/!C3
  Top 0.152: J7.9 57.38,61.19 U$89.20
5V_MISO
  Top 0.152: U$3.12 13.76,25.78 12.45,27.1 12.45,29.21 J1.3
5V_MISO1
  Top 0.152: U$22.12 58.72,25.78 57.4,27.1 57.4,29.21 J3.3
5V_MISO2
  Top 0.152: U$60.12 13.76,64.39 12.45,65.71 12.45,67.82 J5.3
5V_MISO3
  Top 0.152: U$89.12 58.72,64.39 57.4,65.71 57.4,67.82 J7.3
5V_MOSI
  Top 0.152: J1.4 13.73,25.38 U$3.13
5V_MOSI1
  Top 0.152: J3.4 58.69,25.38 U$22.13
5V_MOSI2
  Top 0.152: J5.4 13.73,63.99 U$60.13
5V_MOSI3
  Top 0.152: J7.4 58.69,63.99 U$89.13
5V_SCLK
  Top 0.152: J1.5 11.59,24.98 U$3.14
5V_SCLK1
  Top 0.152: J3.5 56.55,24.98 U$22.14
5V_SCLK2
  Top 0.152: J5.5 11.59,63.59 U$60.14
5V_SCLK3
  Top 0.152: J7.5 56.55,63.59 U$89.14
!BUSY  (via drill 0.3)
  Top 0.152: v37.34,28.07 37.87,27.53 U$1.9
  Bottom 0.152: J1.1 23.11,38.61 32.13,29.59 32.14,29.59 32.64,29.09 36.32,29.09 v37.34,28.07
!BUSY1  (via drill 0.3)
  Top 0.152: v82.3,28.07 82.83,27.53 U$18.9
  Bottom 0.152: J3.1 68.07,38.61 77.09,29.59 77.1,29.59 77.6,29.09 81.28,29.09 v82.3,28.07
!BUSY2  (via drill 0.3)
  Top 0.152: v37.34,66.67 37.87,66.14 U$59.9
  Bottom 0.152: J5.1 23.11,77.22 32.13,68.2 32.14,68.2 32.64,67.7 36.32,67.7 v37.34,66.67
!BUSY3  (via drill 0.3)
  Top 0.152: v82.3,66.67 82.83,66.14 U$88.9
  Bottom 0.152: J7.1 68.07,77.22 77.09,68.2 77.1,68.2 77.6,67.7 81.28,67.7 v82.3,66.67
!CS!(D)  (via drill 0.3)
  Top 0.152: v40,26.04 U$1.12 | U$3.2 20.07,22.98 20.7,22.35 v20.7,21.59
  Bottom 0.152: v40,26.04 35.56,21.59 v20.7,21.59
!CS!(D)1  (via drill 0.3)
  Top 0.152: v84.96,26.04 U$18.12 | U$22.2 65.02,22.98 65.66,22.35 v65.66,21.59
  Bottom 0.152: v84.96,26.04 80.52,21.59 v65.66,21.59
!CS!(D)2  (via drill 0.3)
  Top 0.152: v40,64.64 U$59.12 | U$60.2 20.07,61.59 20.7,60.96 v20.7,60.2
  Bottom 0.152: v40,64.64 35.56,60.2 v20.7,60.2
!CS!(D)3  (via drill 0.3)
  Top 0.152: v84.96,64.64 U$88.12 | U$89.2 65.02,61.59 65.66,60.96 v65.66,60.2
  Bottom 0.152: v84.96,64.64 80.52,60.2 v65.66,60.2
!CS!(SD)
  Top 0.152: J2.CS 20.61,31.19 21.83,29.98 21.83,26.78 19.09,24.05 18.07,24.05 17.8,23.78 U$3.4
!CS!(SD)1
  Top 0.152: J4.CS 65.57,31.19 66.78,29.98 66.78,26.78 64.05,24.05 63.02,24.05 62.76,23.78 U$22.4
!CS!(SD)2
  Top 0.152: J6.CS 20.61,69.8 21.83,68.58 21.83,65.39 19.09,62.66 18.07,62.66 17.8,62.39 U$60.4
!CS!(SD)3
  Top 0.152: J8.CS 65.57,69.8 66.78,68.58 66.78,65.39 64.05,62.66 63.02,62.66 62.76,62.39 U$89.4
!CS!(SR)  (via drill 0.3)
  Top 0.152: U4.1 27.81,9.4 25.91,11.3 25.91,12.47 23.9,14.48 v23.9,16.64 | U$3.3 18.16,23.38 v18.29,23.52
  Bottom 0.152: v18.29,23.52 18.29,22.25 v23.9,16.64
!CS!(SR)1  (via drill 0.3)
  Top 0.152: U3.1 72.77,9.4 70.87,11.3 70.87,12.47 68.86,14.48 v68.86,16.64 | U$22.3 63.11,23.38 v63.25,23.52
  Bottom 0.152: v63.25,23.52 63.25,22.25 v68.86,16.64
!CS!(SR)2  (via drill 0.3)
  Top 0.152: U6.1 27.81,48.01 25.91,49.91 25.91,51.08 23.9,53.09 v23.9,55.24 | U$60.3 18.16,61.99 v18.29,62.12
  Bottom 0.152: v18.29,62.12 18.29,60.86 v23.9,55.24
!CS!(SR)3  (via drill 0.3)
  Top 0.152: U8.1 72.77,48.01 70.87,49.91 70.87,51.08 68.86,53.09 v68.86,55.24 | U$89.3 63.11,61.99 v63.25,62.12
  Bottom 0.152: v63.25,62.12 63.25,60.86 v68.86,55.24
!RES  (via drill 0.3)
  Top 0.152: v36.45,27.18 36.6,27.03 U$1.10 | U$3.10 18.31,26.18 v18.54,26.42
  Bottom 0.152: v18.54,26.42 21.84,23.11 32.38,23.11 v36.45,27.18
!RES1  (via drill 0.3)
  Top 0.152: v81.41,27.18 81.56,27.03 U$18.10 | U$22.10 63.27,26.18 v63.5,26.42
  Bottom 0.152: v63.5,26.42 66.8,23.11 77.34,23.11 v81.41,27.18
!RES2  (via drill 0.3)
  Top 0.152: v36.45,65.79 36.6,65.64 U$59.10 | U$60.10 18.31,64.79 v18.54,65.02
  Bottom 0.152: v18.54,65.02 21.84,61.72 32.38,61.72 v36.45,65.79
!RES3  (via drill 0.3)
  Top 0.152: v81.41,65.79 81.56,65.64 U$88.10 | U$89.10 63.27,64.79 v63.5,65.02
  Bottom 0.152: v63.5,65.02 66.8,61.72 77.34,61.72 v81.41,65.79
BS
  Top 0.152: R4.2 40.26,9.4 | 40.26,9.4 JP1.2 | 39.84,28.03 U$1.8 41.56,28.03 44.07,25.53 44.07,13.97 40.26,10.16 40.26,9.4
BS1
  Top 0.152: R9.2 85.22,9.4 | 85.22,9.4 JP2.2 | 84.8,28.03 U$18.8 86.52,28.03 89.03,25.53 89.03,13.97 85.22,10.16 85.22,9.4
BS2
  Top 0.152: R15.2 40.26,48.01 | 40.26,48.01 JP3.2 | 39.84,66.64 U$59.8 41.56,66.64 44.07,64.14 44.07,52.58 40.26,48.77 40.26,48.01
BS3
  Top 0.152: R21.2 85.22,48.01 | 85.22,48.01 JP4.2 | 84.8,66.64 U$88.8 86.52,66.64 89.03,64.14 89.03,52.58 85.22,48.77 85.22,48.01
D/!C  (via drill 0.3)
  Top 0.152: v40,26.8 39.74,26.53 U$1.11 | U$3.1 19.04,22.58 v19.18,22.45
  Bottom 0.152: v40,26.8 37.33,26.8 33.29,22.76 19.48,22.76 v19.18,22.45
D/!C1  (via drill 0.3)
  Top 0.152: v84.96,26.8 84.7,26.53 U$18.11 | U$22.1 64,22.58 v64.14,22.45
  Bottom 0.152: v84.96,26.8 82.29,26.8 78.25,22.76 64.44,22.76 v64.14,22.45
D/!C2  (via drill 0.3)
  Top 0.152: v40,65.41 39.74,65.14 U$59.11 | U$60.1 19.04,61.19 v19.18,61.06
  Bottom 0.152: v40,65.41 37.33,65.41 33.29,61.37 19.48,61.37 v19.18,61.06
D/!C3  (via drill 0.3)
  Top 0.152: v84.96,65.41 84.7,65.14 U$88.11 | U$89.1 64,61.19 v64.14,61.06
  Bottom 0.152: v84.96,65.41 82.29,65.41 78.25,61.37 64.44,61.37 v64.14,61.06
GDR  (via drill 0.3)
  Top 0.152: 31.93,27.81 Q1.1 35.55,27.8 | v37.74,31.01 38.9,31.01 U$1.2 | 35.55,27.8 v37.08,29.34 | 35.55,27.8 35.55,26.44 R1.2
  Bottom 0.152: v37.08,29.34 37.74,29.99 v37.74,31.01
GDR1  (via drill 0.3)
  Top 0.152: 76.89,27.81 Q2.1 80.5,27.8 | v82.7,31.01 83.86,31.01 U$18.2 | 80.5,27.8 v82.04,29.34 | 80.5,27.8 80.5,26.44 R7.2
  Bottom 0.152: v82.04,29.34 82.7,29.99 v82.7,31.01
GDR2  (via drill 0.3)
  Top 0.152: 31.93,66.42 Q3.1 35.55,66.41 | v37.74,69.62 38.9,69.62 U$59.2 | 35.55,66.41 v37.08,67.95 | 35.55,66.41 35.55,65.05 R13.2
  Bottom 0.152: v37.08,67.95 37.74,68.6 v37.74,69.62
GDR3  (via drill 0.3)
  Top 0.152: 76.89,66.42 Q4.1 80.5,66.41 | v82.7,69.62 83.86,69.62 U$88.2 | 80.5,66.41 v82.04,67.95 | 80.5,66.41 80.5,65.05 R19.2
  Bottom 0.152: v82.04,67.95 82.7,68.6 v82.7,69.62
GND  (via drill 0.3)
  Top 0.152: J2.GND v25.01,34.94 v25.02,34.92 | C5.2 35.43,24.08 | C12.2 33.23,24.51 | 32.64,24.22 32.64,24.13 | R1.1 32.77,26.42 v32.64,26.54 | C4.2 30.49,18.66 30.48,18.67 30.35,18.54 v30.35,17.78 | U$1.17 39.91,23.53 40,23.62 | D2.C v24.64,17.02 | C13.2 v30.36,14.85 v30.35,14.86 | U$3.15 11.24,24.58 v10.99,24.83
  Top 0.254: U2.2 v13.34,9.4 | 19.3,14.86 v19.62,14.54
  other vias: 36.58,18.95 32.64,25.02 35.31,28.45 33.78,34.16 29.59,30.99 29.97,32.89 24.77,15.11 15.75,13.59
  pour Top (isolate 0.305): 6.86,44.96 51.31,44.96 51.31,6.86 6.86,6.86
  pour Bottom (isolate 0.305): 6.86,44.96 51.31,44.96 51.31,6.86 6.86,6.86
GND1  (via drill 0.3)
  Top 0.152: J4.GND 69.97,34.94 v69.98,34.92 | C25.2 80.39,24.08 | C20.2 78.19,24.51 | 77.6,24.22 77.6,24.13 | R7.1 77.72,26.42 v77.6,26.54 | C24.2 75.45,18.66 75.44,18.67 75.31,18.54 v75.31,17.78 | U$18.17 84.87,23.53 84.96,23.62 | D5.C v69.6,17.02 | C21.2 75.32,14.85 v75.31,14.86 | U$22.15 56.2,24.58 v55.95,24.83
  Top 0.254: U1.2 v58.29,9.4 | 64.26,14.86 v64.58,14.54
  other vias: 81.53,18.95 77.6,25.02 80.26,28.45 78.74,34.16 74.55,30.99 74.93,32.89 69.72,15.11 60.71,13.59
  pour Top (isolate 0.305): 51.82,44.96 96.27,44.96 96.27,6.86 51.82,6.86
  pour Bottom (isolate 0.305): 51.82,44.96 96.27,44.96 96.27,6.86 51.82,6.86
GND2  (via drill 0.3)
  Top 0.152: J6.GND 25.01,73.54 v25.02,73.53 | C41.2 35.43,62.69 | C36.2 33.23,63.12 | 32.64,62.83 32.64,62.74 | R13.1 32.77,65.02 v32.64,65.15 | C40.2 30.49,57.27 30.48,57.28 30.35,57.15 v30.35,56.39 | U$59.17 39.91,62.14 40,62.23 | D8.C v24.64,55.63 | C37.2 30.36,53.46 v30.35,53.47 | U$60.15 11.24,63.19 v10.99,63.44
  Top 0.254: U5.2 v13.34,48.01 | 19.3,53.47 v19.62,53.15
  other vias: 36.58,57.56 32.64,63.63 35.31,67.06 33.78,72.77 29.59,69.6 29.97,71.5 24.77,53.72 15.75,52.2
  pour Top (isolate 0.305): 6.86,83.57 51.31,83.57 51.31,45.47 6.86,45.47
  pour Bottom (isolate 0.305): 6.86,83.57 51.31,83.57 51.31,45.47 6.86,45.47
GND3  (via drill 0.3)
  Top 0.152: J8.GND 69.97,73.54 v69.98,73.53 | C57.2 80.39,62.69 | C52.2 78.19,63.12 | 77.6,62.83 77.6,62.74 | R19.1 77.72,65.02 v77.6,65.15 | C56.2 75.45,57.27 75.44,57.28 75.31,57.15 v75.31,56.39 | U$88.17 84.87,62.14 84.96,62.23 | D11.C v69.6,55.63 | C53.2 75.32,53.46 v75.31,53.47 | U$89.15 56.2,63.19 v55.95,63.44
  Top 0.254: U7.2 v58.29,48.01 | 64.26,53.47 v64.58,53.15
  other vias: 81.53,57.56 77.6,63.63 80.26,67.06 78.74,72.77 74.55,69.6 74.93,71.5 69.72,53.72 60.71,52.2
  pour Top (isolate 0.305): 51.82,83.57 96.27,83.57 96.27,45.47 51.82,45.47
  pour Bottom (isolate 0.305): 51.82,83.57 96.27,83.57 96.27,45.47 51.82,45.47
MISO  (via drill 0.3)
  Top 0.152: v26.11,33.53 J2.DO | v25.96,23.69 25.96,20.88 26.53,20.3 26.53,16.49 27.78,15.24 27.78,10.95 28.07,10.67 U4.2 | U$3.9 18.82,25.78 v19.45,26.42
  Bottom 0.152: 26.08,33.5 v26.11,33.53 26.11,23.84 v25.96,23.69 24.43,25.21 20.67,25.21 19.46,26.42 v19.45,26.42
MISO1  (via drill 0.3)
  Top 0.152: v71.07,33.53 J4.DO | v70.92,23.69 70.92,20.88 70.91,20.88 71.49,20.3 71.49,16.49 72.74,15.24 72.74,10.95 73.03,10.67 U3.2 | U$22.9 63.78,25.78 v64.41,26.42
  Bottom 0.152: 71.04,33.5 v71.07,33.53 71.07,23.84 v70.92,23.69 69.39,25.21 65.62,25.21 64.42,26.42 v64.41,26.42
MISO2  (via drill 0.3)
  Top 0.152: v26.11,72.14 J6.DO | v25.96,62.3 25.96,59.48 26.53,58.91 26.53,55.1 27.78,53.85 27.78,49.56 28.07,49.28 U6.2 | U$60.9 18.82,64.39 v19.45,65.02
  Bottom 0.152: 26.08,72.11 v26.11,72.14 26.11,62.45 v25.96,62.3 24.43,63.82 20.67,63.82 19.46,65.02 v19.45,65.02
MISO3  (via drill 0.3)
  Top 0.152: v71.07,72.14 J8.DO | v70.92,62.3 70.92,59.48 70.91,59.48 71.49,58.91 71.49,55.1 72.74,53.85 72.74,49.56 73.03,49.28 U8.2 | U$89.9 63.78,64.39 v64.41,65.02
  Bottom 0.152: 71.04,72.11 v71.07,72.14 71.07,62.45 v70.92,62.3 69.39,63.82 65.62,63.82 64.42,65.02 v64.41,65.02
MOSI  (via drill 0.3)
  Top 0.152: J2.DI 21.71,32.14 v21.72,32.13 | U$1.14 37.45,25.03 36.96,25.53 32.88,25.53 32.67,25.75 v23.97,25.75 23.37,25.15 23.37,18.41 21.84,16.89 21.84,13.46 22.1,13.21 U4.5 | U$3.8 19.18,25.38 v20.21,26.42
  Bottom 0.152: v23.97,25.75 23.97,29.88 22.99,30.86 | 22.99,30.86 v21.72,32.13 | v20.21,26.42 20.21,28.09 22.99,30.86
MOSI1  (via drill 0.3)
  Top 0.152: J4.DI 66.67,32.14 v66.67,32.13 | U$18.14 82.41,25.03 81.92,25.53 77.84,25.53 77.62,25.75 v68.93,25.75 68.33,25.15 68.33,18.41 66.8,16.89 66.8,13.46 67.06,13.21 U3.5 | U$22.8 64.13,25.38 v65.17,26.42
  Bottom 0.152: v68.93,25.75 68.93,29.88 67.95,30.86 | 67.95,30.86 v66.67,32.13 | v65.17,26.42 65.17,28.09 67.95,30.86
MOSI2  (via drill 0.3)
  Top 0.152: J6.DI v21.71,70.75 v21.72,70.74 | U$59.14 37.45,63.64 36.96,64.14 32.88,64.14 32.67,64.36 v23.97,64.36 23.37,63.75 23.37,57.02 21.84,55.5 21.84,52.07 22.1,51.82 U6.5 | U$60.8 19.18,63.99 v20.21,65.03
  Bottom 0.152: v23.97,64.36 23.97,68.49 22.99,69.47 | 22.99,69.47 v21.72,70.74 | v20.21,65.03 20.21,66.7 22.99,69.47
MOSI3  (via drill 0.3)
  Top 0.152: J8.DI 66.67,70.75 v66.67,70.74 | U$88.14 82.41,63.64 81.92,64.14 77.84,64.14 77.62,64.36 v68.93,64.36 68.33,63.75 68.33,57.02 66.8,55.5 66.8,52.07 67.06,51.82 U8.5 | U$89.8 64.13,63.99 v65.17,65.03
  Bottom 0.152: v68.93,64.36 68.93,68.49 67.95,69.47 | 67.95,69.47 v66.67,70.74 | v65.17,65.03 65.17,66.7 67.95,69.47
N$1
  Top 0.152: D5.A 69.6,20.83 | 69.6,20.83 C18.1 | D6.C 70.99,19.44 69.6,20.83
N$2
  Top 0.152: D2.A 24.64,20.83 | 24.64,20.83 C10.1 | D3.C 26.03,19.44 24.64,20.83
N$3  (via drill 0.3)
  Top 0.152: v74.04,28.45 Q2.3 | v74.8,25.15 74.53,24.87 L2.P$2 71.69,24.87 71.09,24.27 | D4.A 71.63,21.22 71.63,23.73 71.09,24.27 | 71.09,24.27 C18.2
  Bottom 0.152: v74.8,25.15 74.8,27.69 v74.04,28.45
N$5  (via drill 0.3)
  Top 0.152: v29.08,28.45 Q1.3 | v29.84,25.15 29.57,24.87 L1.P$2 26.73,24.87 26.13,24.27 | D1.A 26.67,21.22 26.67,23.73 26.13,24.27 | 26.13,24.27 C10.2
  Bottom 0.152: v29.84,25.15 29.84,27.69 v29.08,28.45
N$6
  Top 0.152: D8.A 24.64,59.44 | 24.64,59.44 C34.1 | D9.C 26.03,58.05 24.64,59.44
N$7  (via drill 0.3)
  Top 0.152: v29.08,67.06 Q3.3 | v29.84,63.75 29.57,63.48 L3.P$2 26.73,63.48 26.13,62.88 | D7.A 26.67,59.82 26.67,62.34 26.13,62.88 | 26.13,62.88 C34.2
  Bottom 0.152: v29.84,63.75 29.84,66.29 v29.08,67.06
N$9
  Top 0.152: D11.A 69.6,59.44 | 69.6,59.44 C50.1 | D12.C 70.99,58.05 69.6,59.44
N$10  (via drill 0.3)
  Top 0.152: v74.04,67.06 Q4.3 | v74.8,63.75 74.53,63.48 L4.P$2 71.69,63.48 71.09,62.88 | D10.A 71.63,59.82 71.63,62.34 71.09,62.88 | 71.09,62.88 C50.2
  Bottom 0.152: v74.8,63.75 74.8,66.29 v74.04,67.06
PREVGH
  Top 0.152: D1.C 28.94,16.65 C13.1 31.89,16.65 32.77,17.53 34.04,17.53 34.54,18.03 34.54,19.09 35.01,19.56 36.07,19.56 38.04,21.53 U$1.21
PREVGH1
  Top 0.152: D4.C 73.9,16.65 C21.1 76.85,16.65 77.72,17.53 78.99,17.53 79.5,18.03 79.5,19.09 79.97,19.56 81.03,19.56 83,21.53 U$18.21
PREVGH2
  Top 0.152: D7.C 28.94,55.26 C37.1 31.89,55.26 32.77,56.13 34.04,56.13 34.54,56.64 34.54,57.7 35.01,58.17 36.07,58.17 38.04,60.14 U$59.21
PREVGH3
  Top 0.152: D10.C 73.9,55.26 C53.1 76.85,55.26 77.72,56.13 78.99,56.13 79.5,56.64 79.5,57.7 79.97,58.17 81.03,58.17 83,60.14 U$88.21
PREVGL
  Top 0.152: D3.A 34.29,15.75 35.19,16.65 C9.1 35.6,16.65 38.05,19.1 38.05,20.4 38.18,20.53 U$1.23
PREVGL1
  Top 0.152: D6.A 79.25,15.75 80.15,16.65 C29.1 80.56,16.65 83.01,19.1 83.01,20.4 83.14,20.53 U$18.23
PREVGL2
  Top 0.152: D9.A 34.29,54.36 35.19,55.26 C45.1 35.6,55.26 38.05,57.7 38.05,59.01 38.18,59.14 U$59.23
PREVGL3
  Top 0.152: D12.A 79.25,54.36 80.15,55.26 C61.1 80.56,55.26 83.01,57.7 83.01,59.01 83.14,59.14 U$88.23
RESE  (via drill 0.3)
  Top 0.152: R2.2 v32.77,29.72 32.53,29.72 Q1.2 | v40.13,30.48 40.08,30.53 U$1.3
  Bottom 0.152: v40.13,30.48 39.15,30.48 38.09,31.54 34.59,31.54 v32.77,29.72
RESE1  (via drill 0.3)
  Top 0.152: R8.2 v77.72,29.72 77.49,29.72 Q2.2 | v85.09,30.48 85.04,30.53 U$18.3
  Bottom 0.152: v85.09,30.48 84.11,30.48 83.05,31.54 79.55,31.54 v77.72,29.72
RESE2  (via drill 0.3)
  Top 0.152: R14.2 v32.77,68.33 32.53,68.33 Q3.2 | v40.13,69.09 40.08,69.14 U$59.3
  Bottom 0.152: v40.13,69.09 39.15,69.09 38.09,70.15 34.59,70.15 v32.77,68.33
RESE3  (via drill 0.3)
  Top 0.152: R20.2 v77.72,68.33 77.49,68.33 Q4.2 | v85.09,69.09 85.04,69.14 U$88.3
  Bottom 0.152: v85.09,69.09 84.11,69.09 83.05,70.15 79.55,70.15 v77.72,68.33
SCLK  (via drill 0.3)
  Top 0.152: J2.SCLK 23.91,28.61 22.41,27.11 22.41,22.67 v21.97,22.23 | U$1.13 37.87,25.53 v37.72,25.69 | U4.6 21.46,11.94 21.34,12.06 21.34,21.59 v21.97,22.23 | 21.97,22.09 v21.97,22.23 | U$3.7 18.28,24.98 v18.41,24.85 | v20.7,23.37 20.83,23.37 v21.97,22.23
  Bottom 0.152: 37.72,25.56 v37.72,25.69 37.72,25.61 34.33,22.23 v21.97,22.23 | v18.41,24.85 19.9,23.37 v20.7,23.37
SCLK1  (via drill 0.3)
  Top 0.152: J4.SCLK 68.87,28.61 67.37,27.11 67.37,22.67 v66.93,22.23 | U$18.13 82.83,25.53 v82.68,25.69 | U3.6 66.42,11.94 66.29,12.06 66.29,21.59 v66.93,22.23 | 66.93,22.09 v66.93,22.23 | U$22.7 63.24,24.98 v63.37,24.85 | v65.66,23.37 65.79,23.37 v66.93,22.23
  Bottom 0.152: 82.68,25.56 v82.68,25.69 82.68,25.61 79.29,22.23 v66.93,22.23 | v63.37,24.85 64.86,23.37 v65.66,23.37
SCLK2  (via drill 0.3)
  Top 0.152: J6.SCLK 23.91,67.22 22.41,65.72 22.41,61.28 v21.97,60.83 | U$59.13 37.87,64.14 v37.72,64.29 | U6.6 21.46,50.55 21.34,50.67 21.34,60.2 v21.97,60.83 | 21.97,60.7 v21.97,60.83 | U$60.7 18.28,63.59 v18.41,63.46 | v20.7,61.98 20.83,61.98 v21.97,60.83
  Bottom 0.152: 37.72,64.17 v37.72,64.29 37.72,64.22 34.33,60.83 v21.97,60.83 | v18.41,63.46 19.9,61.98 v20.7,61.98
SCLK3  (via drill 0.3)
  Top 0.152: J8.SCLK 68.87,67.22 67.37,65.72 67.37,61.28 v66.93,60.83 | U$88.13 82.83,64.14 v82.68,64.29 | U8.6 66.42,50.55 66.29,50.67 66.29,60.2 v66.93,60.83 | 66.93,60.7 v66.93,60.83 | U$89.7 63.24,63.59 v63.37,63.46 | v65.66,61.98 65.79,61.98 v66.93,60.83
  Bottom 0.152: 82.68,64.17 v82.68,64.29 82.68,64.22 79.29,60.83 v66.93,60.83 | v63.37,63.46 64.86,61.98 v65.66,61.98
VCOM
  Top 0.152: U$1.24 38.92,18.18 C1.1
VCOM1
  Top 0.152: U$18.24 83.88,18.18 C17.1
VCOM2
  Top 0.152: U$59.24 38.92,56.79 C33.1
VCOM3
  Top 0.152: U$88.24 83.88,56.79 C49.1
VDD
  Top 0.152: 31.84,20.46 C4.1 31.89,20.46 32.82,21.39 36.4,21.39 38.04,23.03 U$1.18
VDD1
  Top 0.152: 76.8,20.46 C24.1 76.85,20.46 77.78,21.39 81.36,21.39 83,23.03 U$18.18
VDD2
  Top 0.152: 31.84,59.07 C40.1 31.89,59.07 32.82,60 36.4,60 38.04,61.64 U$59.18
VDD3
  Top 0.152: 76.8,59.07 C56.1 76.85,59.07 77.78,60 81.36,60 83,61.64 U$88.18
VGH
  Top 0.152: C6.1 33.16,31.36 33.79,30.73 36.71,30.73 37.91,29.53 U$1.5
VGH1
  Top 0.152: C26.1 78.12,31.36 78.75,30.73 81.67,30.73 82.86,29.53 U$18.5
VGH2
  Top 0.152: C42.1 33.16,69.97 33.79,69.34 36.71,69.34 37.91,68.14 U$59.5
VGH3
  Top 0.152: C58.1 78.12,69.97 78.75,69.34 81.67,69.34 82.86,68.14 U$88.5
VGL
  Top 0.152: C7.1 34.81,31.37 36.63,31.37 37.96,30.03 U$1.4
VGL1
  Top 0.152: C27.1 81.58,31.37 82.92,30.03 U$18.4
VGL2
  Top 0.152: C43.1 34.81,69.98 36.63,69.98 37.96,68.64 U$59.4
VGL3
  Top 0.152: C59.1 81.58,69.98 82.92,68.64 U$88.4
VPP
  Top 0.152: C8.1 33.66,20.46 | 33.66,20.46 33.74,20.46 | U$1.19 37.98,22.53 36.53,21.09 34.28,21.09 33.66,20.46
VPP1
  Top 0.152: C28.1 78.61,20.46 | 78.61,20.46 78.7,20.46 | U$18.19 82.93,22.53 81.49,21.09 79.24,21.09 78.61,20.46
VPP2
  Top 0.152: C44.1 33.66,59.07 | 33.66,59.07 33.74,59.07 | U$59.19 37.98,61.14 36.53,59.7 34.28,59.7 33.66,59.07
VPP3
  Top 0.152: C60.1 78.61,59.07 | 78.61,59.07 78.7,59.07 | U$88.19 82.93,61.14 81.49,59.7 79.24,59.7 78.61,59.07
VSH
  Top 0.152: U$1.20 37.91,22.03 36.33,20.46 C3.1
VSH1
  Top 0.152: U$18.20 82.86,22.03 81.29,20.46 C23.1
VSH2
  Top 0.152: U$59.20 37.91,60.64 36.33,59.07 C39.1
VSH3
  Top 0.152: U$88.20 82.86,60.64 81.29,59.07 C55.1
VSL
  Top 0.152: C2.1 33.77,16.89 34.04,16.89 34.42,17.28 35.69,17.28 37.75,19.33 37.75,20.68 38.1,21.03 U$1.22
VSL1
  Top 0.152: C22.1 78.73,16.89 78.99,16.89 79.38,17.28 80.65,17.28 82.71,19.33 82.71,20.68 83.06,21.03 U$18.22
VSL2
  Top 0.152: C38.1 33.77,55.5 34.04,55.5 34.42,55.88 35.69,55.88 37.75,57.94 37.75,59.29 38.1,59.64 U$59.22
VSL3
  Top 0.152: C54.1 78.73,55.5 78.99,55.5 79.38,55.88 80.65,55.88 82.71,57.94 82.71,59.29 83.06,59.64 U$88.22

## Text on the board
Top: X01 | X01 | X01 | X01
Milling: v-score | v-score | v-score | v-score | v-score | v-score
tDocu: 1 | 1 | 24 | 24 | 1 | 1 | 24 | 24